# Altium PCB mchf_pro_rf.PcbDoc (part 3 of 4)
Units mm, origin at the board's own origin, x right, y up, seen from the top; angles counter-clockwise.
Board outline 200 x 140.01 mm, 2 copper layers (Top Layer, Bottom Layer); 387 components, 251 nets, 1103 pads, 620 vias.
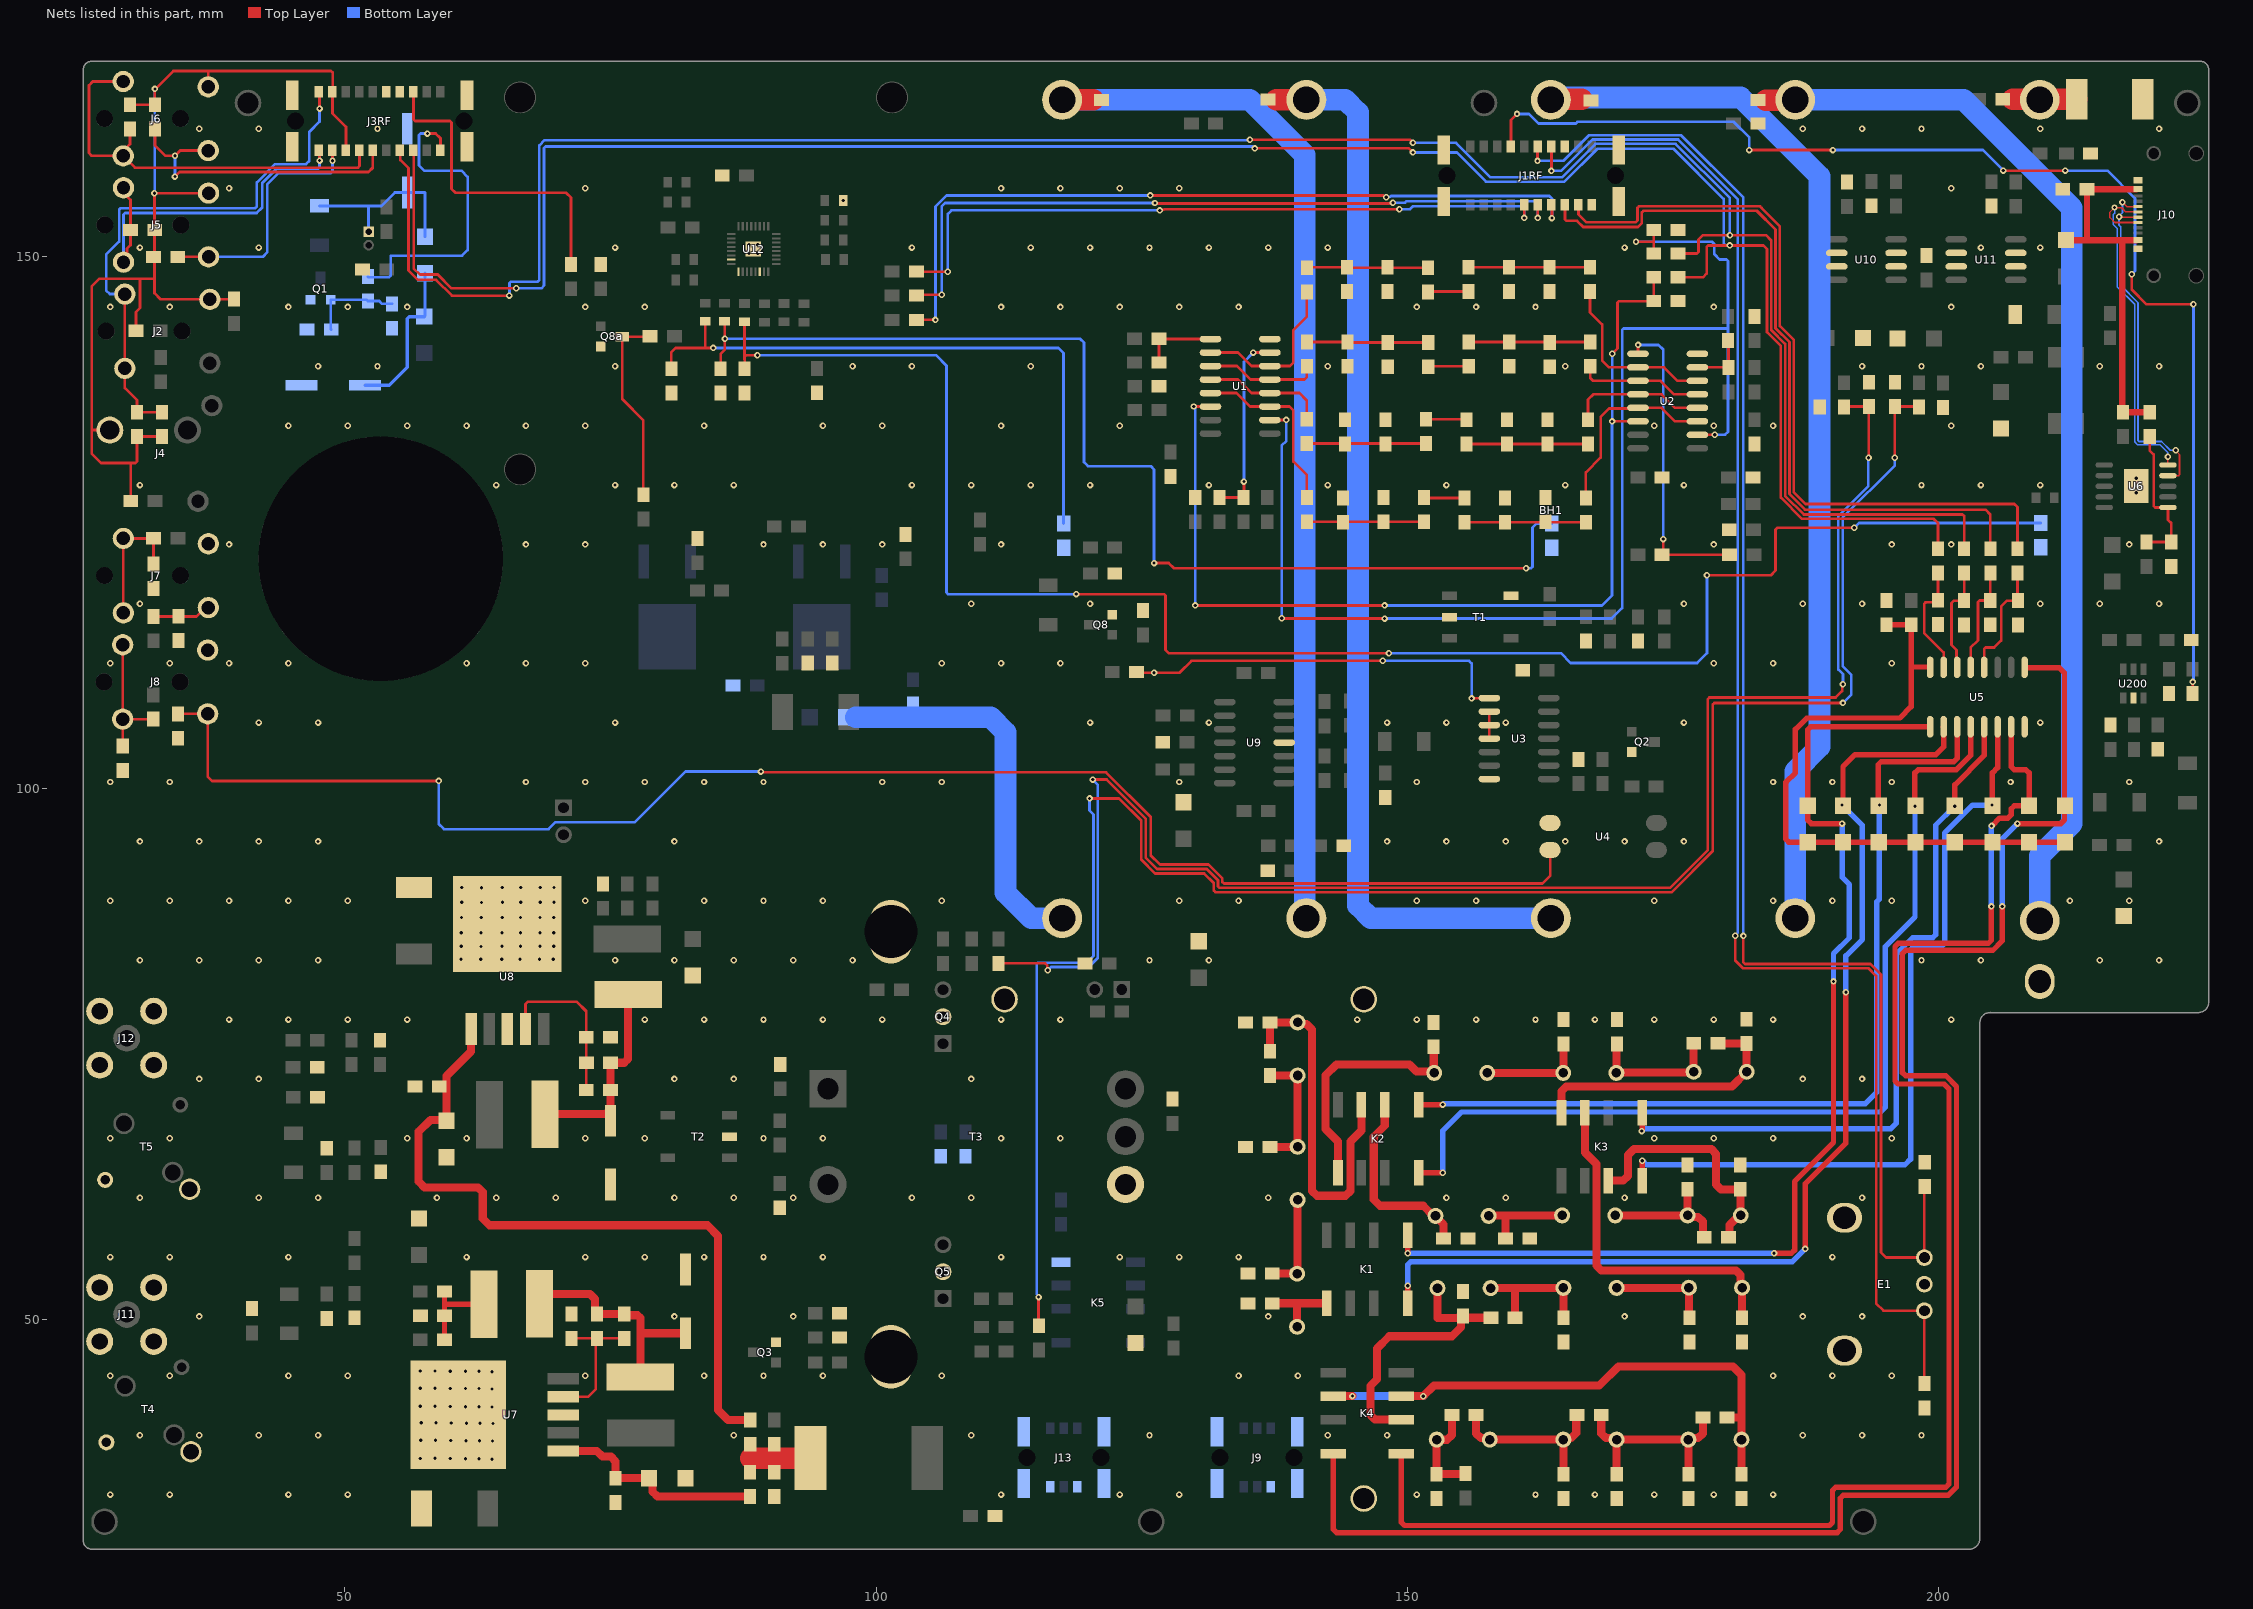
[diagram p2: the nets of this part, all layers, seen from the top]

## Via types
v1: diameter 0.61, hole 0.305, Top Layer to Bottom Layer, 620 vias

## Nets (pads, with @x,y where several pads share a name; then routed paths per layer and width w, separated by ;. In a path a pad name is that pad's centre, name@x,y a point inside that pad or via, vN(x,y) a via of type N, cw(c..) or ccw(c..) an arc to the next point about the centre after c; other vN are vias at no path point) (continued)
NetC64_1: (continued)
  Top Layer w0.762: K3.7@168.9,63.069 170.307,63.069 170.764,63.525 170.764,65.481 171.323,66.04 178.598,66.04 179.045,65.594 179.045,62.702 179.491,62.255 C65.2@181.32,62.255 181.343,62.232 181.343,59.824 L21.2@181.366,59.801 181.215,59.801 180.324,58.91 180.324,57.975 180.133,57.785 C64.1@180.086,57.785
NetC66_1: C66.1 K3.3 L22.1 | length 32.9
  Top Layer w0.762: K3.3@166.7,69.469 166.7,65.719 167.792,64.627 167.792,55.072 168.239,54.626 180.906,54.626 181.352,54.179 181.352,53.142 L22.1@181.493,53.001 C66.1@181.493,50.165
NetC67_1: C67.1 L22.2 L23.1 | length 9.7
  Top Layer w0.762: L23.1@169.683,52.975 169.696,52.988 176.481,52.988 L22.2@176.493,53.001 176.511,52.983 176.511,50.183 C67.1@176.53,50.165
NetC68_1: C68.1 C69.2 L23.2 L24.1 | length 12.5
  Top Layer w0.762: L24.1@157.831,52.959 157.84,52.967 160.02,52.967 ; C69.2@160.139,50.171 160.139,52.848 160.02,52.967 ; C68.1@164.683,50.165 164.683,52.959 164.675,52.967 160.02,52.967
NetC69_1: C69.1 C70.1 K4.2 L24.2 | length 27.3
  Top Layer w0.762: K4.2@149.428,40.592 149.425,40.589 146.954,40.589 146.507,41.036 146.507,43.739 147.151,44.383 147.151,47.29 148.291,48.429 154.18,48.429 155.029,49.278 155.029,50.152 C70.1@155.044,50.168 ; L24.2@152.831,52.959 152.831,50.165 154.737,50.165 154.74,50.168 C70.1@155.044,50.168 ; C70.1@155.219,50.343 C70.1@155.044,50.168 ; C69.1@157.853,50.171 157.85,50.168 C70.1@155.044,50.168
NetC71_1: C71.1 K2.5 L25.1 | length 23.1
  Top Layer w0.762: K2.5@143.469,63.805 143.469,66.741 142.287,67.923 142.287,72.988 143.315,74.016 150.198,74.016 150.861,73.353 152.375,73.353 L25.1@152.48,73.249 ; C71.1@152.443,75.677 152.48,75.641 L25.1@152.48,73.249 ; L25.1@152.516,73.212 L25.1@152.48,73.249
NetC72_1: C72.1 L25.2 L26.1 | length 9.9
  Top Layer w0.762: L25.2@157.516,73.212 L26.1@164.663,73.212 164.67,73.219 164.67,75.93 C72.1@164.677,75.938
NetC73_1: C73.1 C74.2 L26.2 L27.1 | length 12.8
  Top Layer w0.762: L26.2@169.663,73.212 L26.2@169.693,73.242 ; C73.1@169.723,75.946 169.693,75.916 L26.2@169.693,73.242 ; C74.2@176.936,75.997 176.931,75.991 176.931,73.319 L27.1@176.926,73.314 176.978,73.314 176.987,73.304 176.946,73.263 169.713,73.263 L26.2@169.693,73.242
NetC74_1: C74.1 C75.1 K3.4 L27.2 | length 25.6
  Top Layer w0.762: K3.4@164.5,69.469 164.5,71.482 164.947,71.929 180.541,71.929 L27.2@181.926,73.314 181.923,73.316 181.923,75.965 C75.1@181.92,75.968 181.905,75.982 179.237,75.982 C74.1@179.222,75.997
NetC76_2: C76.2 F1.2 J10.A4 J10.A9 J10.B4 J10.B9 R29.2 R30.1 | length 34.8
  Top Layer w0.61: F1.2@211.98,151.575 215.011,151.575 217.283,151.575 ; 213.889,151.575 213.947,151.634 C76.2@213.947,156.364 J10.B4@218.606,156.364 ; J10.A4@218.606,151.575 217.283,151.575 ; R30.1@219.848,135.379 219.844,135.375 217.349,135.375 R29.2@217.345,135.371 217.283,135.433 217.283,151.575
NetC77_1: C77.1 R30.2 R34.2 U6.1 | length 13.8
  Top Layer w0.254: R34.2@219.532,123.162 C77.1@221.877,123.162 221.877,124.942 221.567,125.252 U6.1@221.567,126.415 220.375,126.415 220.226,126.563 220.226,131.395 219.848,131.773 R30.2@219.848,133.093
NetC79_2: C79.2 M18.2 M19.2 R41.2 RFC1.2 | length 5.6
  Top Layer w2.032: 88.231,36.954 93.786,36.954 RFC1.2@93.814,36.982
NetC80_1: C80.1 C81.1 M18.1 U7.1 | length 20.8
  Top Layer w0.762: U7.1@70.563,37.635 73.713,37.635 74.244,37.104 75.042,37.104 75.489,36.658 C80.1@75.489,35.072 75.491,35.074 C81.1@78.646,35.074 ; C81.1@78.644,35.076 78.981,34.739 78.981,33.797 79.428,33.35 M18.1@88.148,33.35
NetC82_1: C82.1 R35.1 R36.2 U7.4 | length 13.2
  Top Layer w0.254: U7.4@70.563,42.741 72.921,42.741 73.609,43.429 73.609,48.102 R36.2@73.736,48.229 ; R35.1@71.336,48.229 R36.2@73.736,48.229 ; C82.1@76.302,48.229 R36.2@73.736,48.229
NetC82_2: C82.2 C83.1 L28.2 R36.1 RFC2.1 | length 21.3
  Top Layer w0.762: RFC2.1@68.351,51.497 68.351,51.506 69.24,52.395 73.099,52.395 73.546,51.949 73.546,50.706 R36.1@73.736,50.515 C82.2@76.302,50.515 76.386,50.515 76.492,50.41 77.558,50.41 77.817,50.151 77.817,48.709 ; L28.2@77.817,44.592 77.817,48.709 ; C83.1@82.073,48.709 77.817,48.709
NetC84_1: C84.1 M20.2 R36A.2 RFC2.2 | length 8.3
  Top Layer w0.508: R36A.2@59.395,48.104 59.395,51.497 ; M20.2@59.395,52.648 59.395,51.497 ; C84.1@59.399,50.362 C84.1@59.403,50.358 ; RFC2.2@63.093,51.434 59.458,51.434 59.395,51.497
NetC85_1: C85.1 C86.1 M19.1 U8.1 | length 68.9
  Top Layer w0.762: U8.1@61.91,77.342 61.899,77.33 61.899,75.227 59.588,72.917 C86.1@59.588,68.707 59.512,68.783 58.064,68.783 56.961,67.68 56.961,62.987 57.515,62.433 62.547,62.433 62.993,61.987 62.993,59.514 63.63,58.877 84.125,58.877 85.141,57.861 85.141,41.478 86.068,40.551 M19.1@88.159,40.551
NetC87_1: C87.1 R37.1 R38.2 U8.4 | length 15.9
  Top Layer w0.254: U8.4@67.015,77.342 67.005,77.352 67.005,79.68 67.234,79.908 71.831,79.908 72.728,79.011 R37.1@72.728,76.568 R38.2@72.728,74.168 ; C87.1@72.728,71.603 R38.2@72.728,74.168 ; R38.2@72.737,74.168 R38.2@72.728,74.168
NetC87_2: C87.2 C88.1 L29.2 R38.1 RFC3.1 | length 18.6
  Top Layer w0.762: L29.2@68.863,69.323 68.871,69.331 74.568,69.331 75.014,69.777 C87.2@75.014,71.603 75.014,74.16 R38.1@75.023,74.168 76.302,74.168 76.663,74.529 RFC3.1@76.663,80.57

## Text inside footprints (layer, text, board x,y; h text height)
BH1: Bottom Overlay "5S - 21700, v 0.2" at 219.453,145.106 h1.52 r90
K1: Top Overlay "2G/2F" at 147.978,56.487 h0.81 r270
K2: Top Overlay "2G/2F" at 149.019,68.755 h0.81 r270
K3: Top Overlay "2G/2F" at 170.05,68.019 h0.81 r270
K4: Top Overlay "2G/2F" at 147.978,39.442 h0.81 r180
T3: Top Overlay "3T" at 112.719,68.463 h1.52; Top Overlay "1T" at 103.469,66.463 h1.52
TF1: Bottom Overlay "TURBO FAN" at 102.721,128.698 h1.27
U7: Top Overlay "v 0.2" at 67.261,38.919 h0.81 r90
U8: Top Overlay "v 0.2" at 63.194,80.466 h0.81